# Altium PCB VoltageIndicator_V4.PcbDoc
Units mm, origin at the board's own origin, x right, y up, seen from the top; angles counter-clockwise.
Board outline 100 x 58.17 mm, 2 copper layers (Top Layer, Bottom Layer); 60 components, 37 nets, 146 pads, 21 vias.
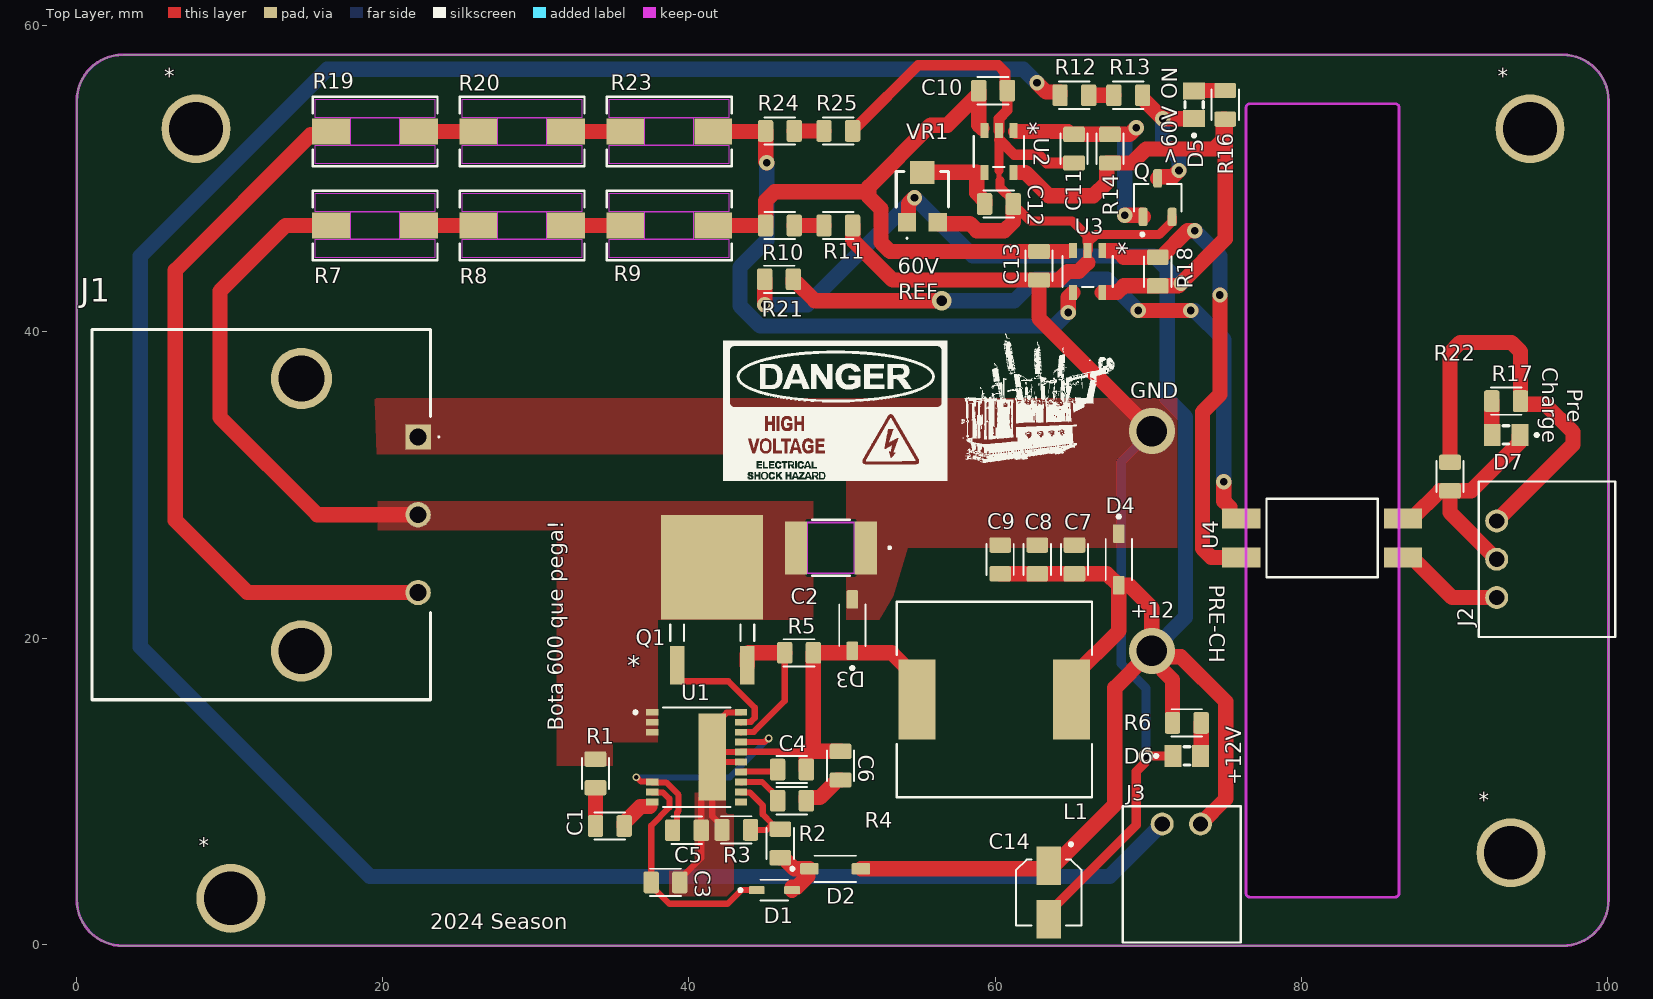
[diagram p0: Top Layer view]
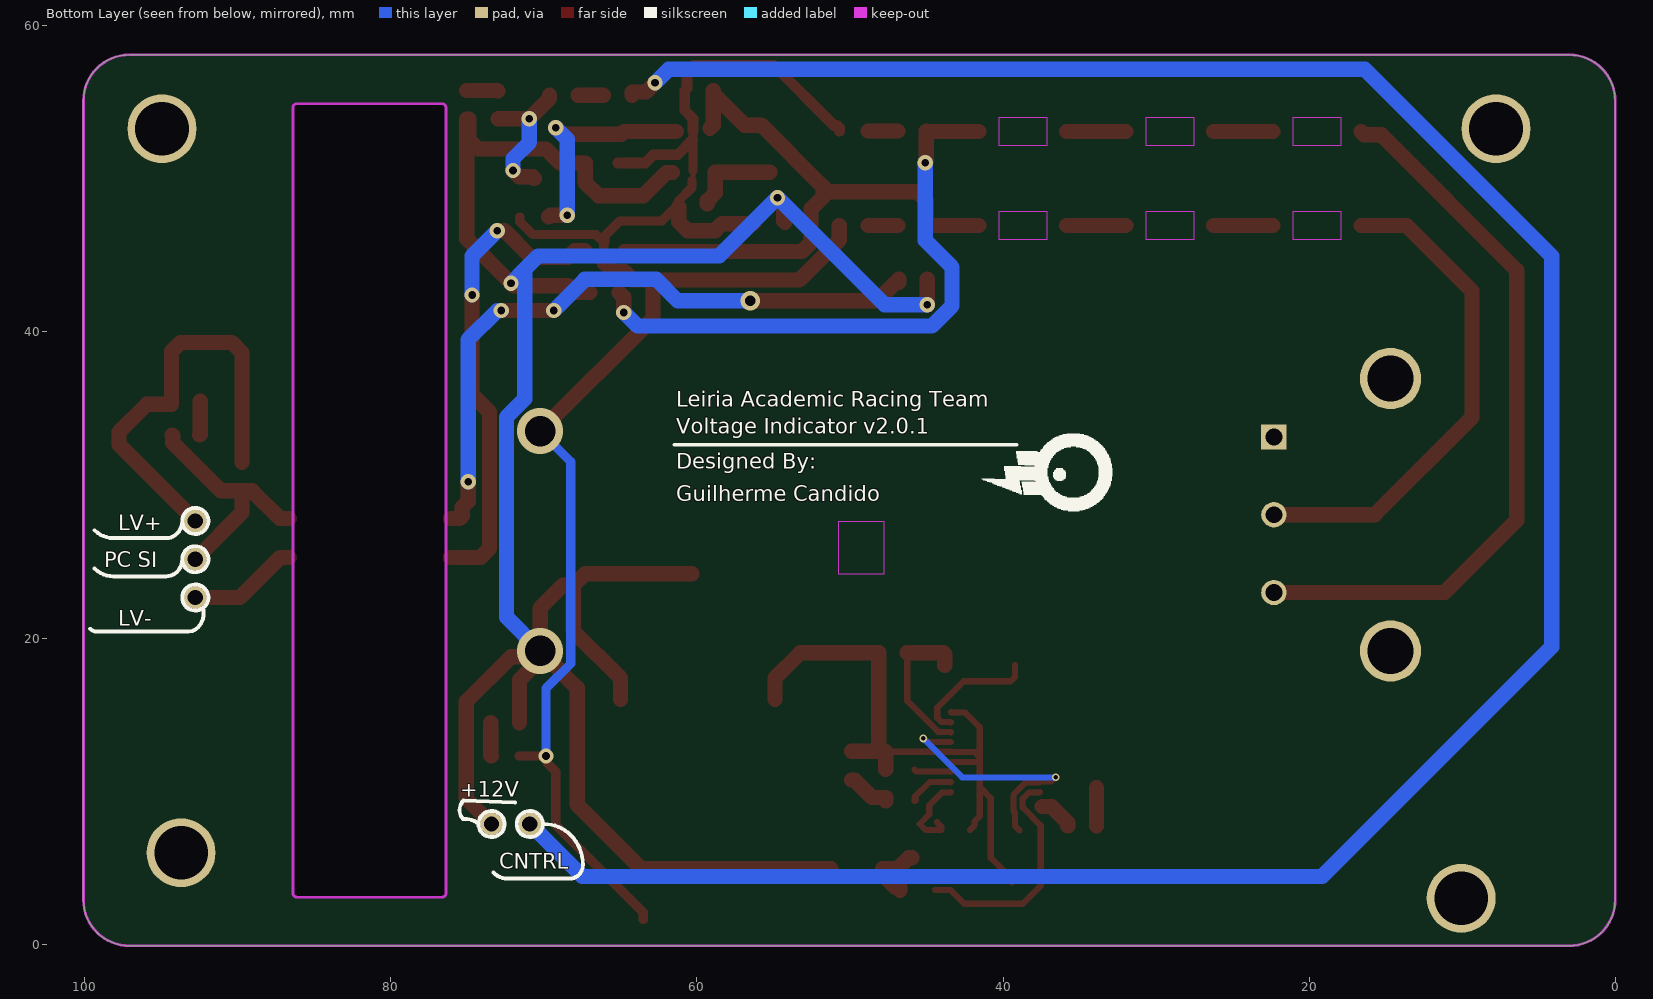
[diagram p1: Bottom Layer view, seen from below]
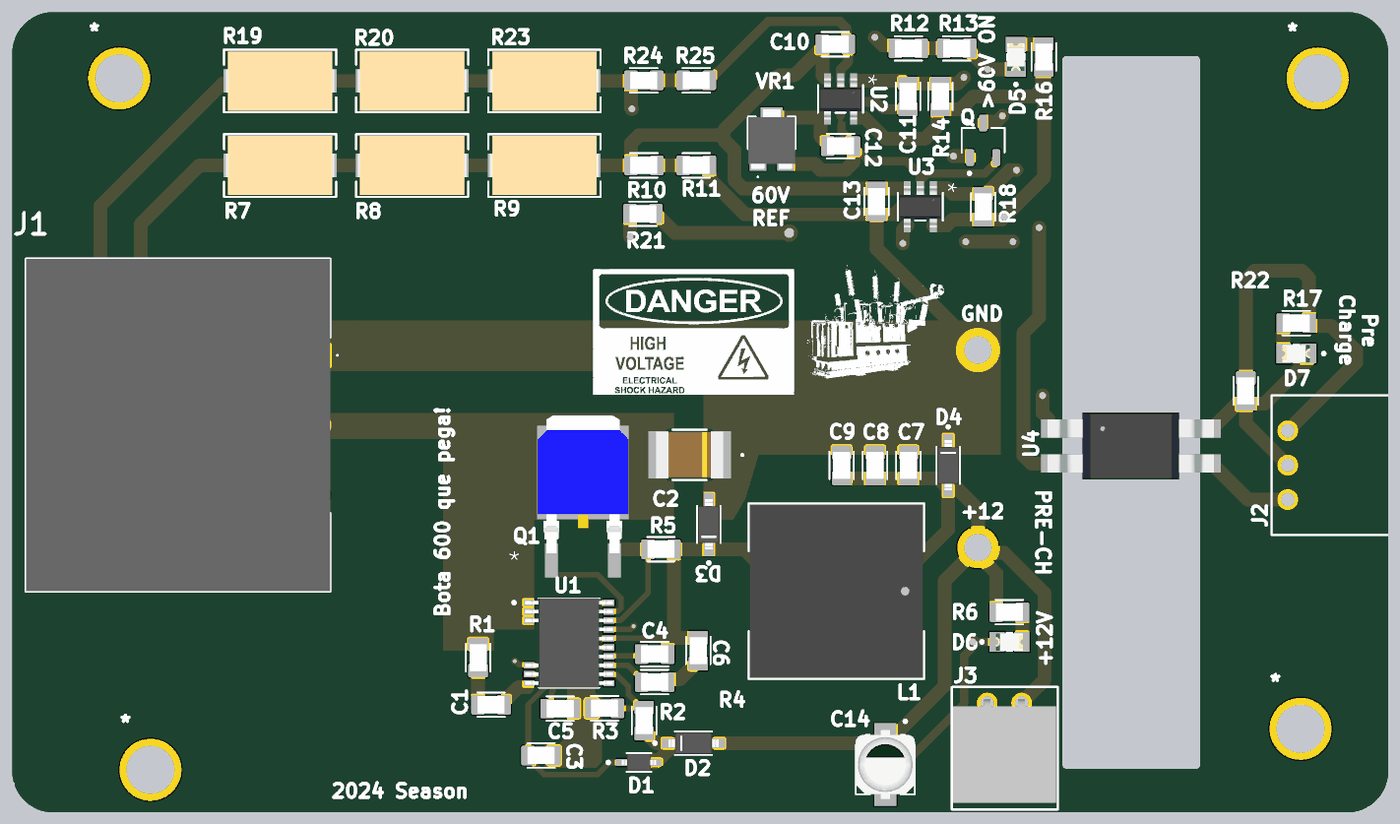
[diagram p2: 3D render of the assembled board from above, using the file's embedded part models]

## Layer stack, top to bottom
Top Solder: solder mask 0.0102, Solder Resist, Dk 3.5
Top Layer: signal copper 0.0356
Dielectric 1: dielectric 0.32, FR-4, Dk 4.8
Bottom Layer: signal copper 0.0356
Bottom Solder: solder mask 0.0102, Solder Resist, Dk 3.5

## Board outline
0.05,2.925 0.05,55.091 cw(c3.05,55.091) 3.05,58.091 97.05,58.091 cw(c97.05,55.091) 100.05,55.091 100.05,2.925 cw(c97.05,2.925) 97.05,-0.075 3.05,-0.075 cw(c3.05,2.925)
cut-out: 76.375,3.354 76.375,54.646 cw(c76.629,54.646) 76.629,54.9 86.121,54.9 cw(c86.121,54.646) 86.375,54.646 86.375,3.354 cw(c86.121,3.354) 86.121,3.1 76.629,3.1 cw(c76.629,3.354)

## Design rules (kind name [scope] priority, off if disabled: settings)
Clearance [All] p1: gap=0.2 ignorepadtopadclearanceinfootprint=TRUE
HoleSize [All] p1: absolutevalues=TRUE maxlimit=6.3 minlimit=0.3 maxpercent=80.000 minpercent=20.000
HoleToHoleClearance [All] p1: gap=0.5 allowstackedmicrovias=TRUE
PolygonConnect DirectConn [InNetClass('DirectPour')] p1: connectstyle=Direct reliefconductorwidth=0.254 reliefentries=4 polygonreliefangle="90 Angle" airgapwidth=0.254
PolygonConnect [All] p2: connectstyle=Relief reliefconductorwidth=0.254 reliefentries=4 polygonreliefangle="90 Angle" airgapwidth=0.254
RoutingVias [All] p1: holewidth=0.711 width=1.27 viastyle="Through Hole" minholewidth=0.3 minwidth=0.5 maxholewidth=6.3 maxwidth=10
SilkToSilkClearance [All] p1: silktosilkclearance=0
SolderMaskExpansion [All] p1: expansion=0.102 istentingtop=FALSE
SupplyNets "Schematic Supply Nets_2" [InNet('+12')] p1: voltage=0.000
SupplyNets "Schematic Supply Nets_1" [InNet('GND')] p2: voltage=0.000
SupplyNets "Schematic Supply Nets" [InNet('LV GND')] p3: voltage=0.000
UnRoutedNet [All] p1: checkbadconnections=TRUE
Width [All] p1: maxlimit=5 minlimit=0.127 preferedwidth=0.5 minimp=50.000000 maximp=50.000000 favimp=50.000000
26 further rules are at their usual default settings.

## Classes and differential pairs
net class DirectPour: GND NetC2_2 NetC3_2
component class "Pre-Charge Detector": C13 D7 R17 R18 R19 R20 R21 R22 R23 R24 R25 U3 U4
component class Connectors: J1 J2 J3
component class Buck: * C1 C2 C3 C4 C5 C6 C7 C8 C9 C14 D1 D2 D3 D4 D6 L1 Q1 R1 R2 R3 R4 R5 R6 U1
component class 60V_Detector: C10 C11 C12 D5 Q R7 R8 R9 R10 R11 R12 R13 R14 R16 U2 VR1

## Components (designator, comment, footprint, x,y, rotation, side; value= is the part's Value field where it differs from the comment)
* "M3 Mounting Hole" "M3 - Mounting Hole"#1 94.615,6 r0 top
* "M3 Mounting Hole" "M3 - Mounting Hole"#2 85.05,50.15 r0 top
* "M3 Mounting Hole" "M3 - Mounting Hole"#3 9.999,3.025 r0 top
* "M3 Mounting Hole" "M3 - Mounting Hole"#4 6.303,53.265 r0 top
C1 "10pF 630VDC" 0805 34.844,7.747 r0 top
C2 "0.1uF 630VDC" 1812 49.276,25.908 r180 top
C3 "10uF 25V" 0805 38.481,4.064 r0 top
C4 "0.1uF" 0805 46.736,11.43 r180 top
C5 "10uF 25V" 0805 39.875,7.469 r0 top
C6 "0.1uF" 0805 49.911,11.684 r270 top
C7 "47uF" 0805 65.179,25.147 r270 top
C8 "47uF" 0805 62.753,25.147 r270 top
C9 "47uF" 0805 60.327,25.147 r270 top
C10 "10uF" 0805 59.863,55.753 r180 top
C11 "10uF" 0805 65.15,51.965 r90 top
C12 "0805_Capacitor" 0805 60.25,48.35 r180 top
C13 "10uF" 0805 62.865,44.323 r90 top
C14 "Electrolytic 4x5.4" "Electrolytic 4x5.4" 63.5,3.401 r270 top
D1 "CMDSH-3TR" SOD-323 45.593,3.556 r0 top
D2 "US1KFA" SOD123 49.559,4.953 r0 top
D3 "US1KFA" SOD123 50.673,20.857 r90 top
D4 "13V" SOD123 68.072,25.146 r270 top
D5 "LED 0805" "LED 0805" 72.989,54.829 r90 top
D6 "LED 0805" "LED 0805" 72.517,12.319 r0 top
D7 "LED 0805" "LED 0805" 93.359,33.275 r180 top
J1 "1-178138-2" 11781382 22.33,33.147 r270 top
J2 "S3B-XH-A(LF)(SN)" "3P JST XH2.54mm 90º" 92.745,27.662 r270 top
J3 "S2B-XH-A-1(LF)(SN)" "2P JST XH2.54mm 90º" 70.906,7.874 r0 top
L1 "7447709102 - WURTH" "7447709102 - WURTH" 59.944,16.002 r180 top
Q "N-MOS" AO3402 70.612,48.768 r90 top
Q1 "N-MOS" "DPAK - MOSFET" 41.529,24.638 r0 top
R1 "10k" 0805 33.909,11.176 r270 top
R2 "21.5k" 0805 45.974,6.604 r270 top
R3 "2.49k" 0805 43.099,7.493 r180 top
R4 "22.1k" 0805 46.736,9.398 r0 top
R5 "220mR" 0805 47.198,19.05 r180 top
R6 "10k" 0805 72.517,14.478 r180 top
R7 "SMV1W390KJT" SMV1W390KJT 19.518,46.945 r180 top
R8 "SMV1W390KJT" SMV1W390KJT 29.119,46.945 r180 top
R9 "SMV1W390KJT" SMV1W390KJT 38.72,46.944 r180 top
R10 "10K" 0805 45.95,46.95 r0 top
R11 "10K" 0805 49.76,46.95 r0 top
R12 "10K" 0805 65.174,55.454 r180 top
R13 "10K" 0805 68.689,55.454 r180 top
R14 "10K" 0805 67.5,51.965 r270 top
R16 "10k" 0805 75.021,54.829 r270 top
R17 "10k" 0805 93.359,35.485 r0 top
R18 "10K" 0805 70.612,43.942 r270 top
R19 "SMV1W390KJT" SMV1W390KJT 19.518,53.083 r180 top
R20 "SMV1W390KJT" SMV1W390KJT 29.119,53.083 r180 top
R21 "10K" 0805 45.893,43.434 r180 top
R22 "0805_Resistor" 0805 89.697,30.562 r90 top
R23 "SMV1W390KJT" SMV1W390KJT 38.72,53.083 r180 top
R24 "10K" 0805 45.95,53.125 r0 top
R25 "10K" 0805 49.76,53.125 r0 top
U1 "My_LT8316" IC_LT8316EFE#PBF 40.515,12.244 r0 top
U2 "MIC6270YM5-TR" MIC6270 60.25,51.775 r270 top
U3 "MIC6270YM5-TR" MIC6270 66.04,43.942 r270 top
U4 "VO617A-3X018T" VO617A 81.35,26.55 r0 top
VR1 "3203X502P" 3203X502P 55.245,48.768 r0 top

## Footprints (in the part's own frame and the unit in brackets; to place one, negate y for a bottom-side part, rotate by r counter-clockwise, add the part's x,y. Pads: shape width x height; smd on the part's side, far side on the other; paste and mask are expansions set on the pad)
"2P JST XH2.54mm 90º" [mil]
  round 59 / inner round 60 / far side round 59 hole 39 paste-99999 mask+0: 1(0,0) 2(98.43,0)
  silkscreen extent -101,-304 202,46, body extent -98,-285 197,10, height 236
"3P JST XH2.54mm 90º" [mil]
  round 59 / inner round 60 / far side round 59 hole 39 paste-99999 mask+0: 1(0,0) 2(98.43,0) 3(196.86,0)
  silkscreen extent -101,-46 298,304, body extent -98,-10 295,285, height 236
0805 [mm]
  rrect25% 1x1.42 smd: 1(-0.935,0) 2(0.935,0)
  silkscreen extent -1,-0.89 1,0.89, body extent -1,-0.63 1,0.63, height 0.6
1812 [mil]
  rect 57x136 smd paste+0 mask+0: 1(-89.5,0) 2(89.5,0)
  Top Layer keep-out region: -59,-65 -59,65 59,65 59,-65
  Keep-Out Layer region: -59,-67 -59,67 59,67 59,-67
  silkscreen extent -154,-72 49,72, body extent -96,-67 96,67, height 86
3203X502P [mm]
  rect 1.2x1.2 smd: 1(-1,-1.6) 3(1,-1.6)
  rect 1.6x1.5 smd: 2(0,1.65)
  silkscreen extent -1.7,-2.7 1.7,1.7, body extent -1.7,-2.08 1.7,2.25, height 2.2
11781382 [mm]
  rect 1.65x1.65 hole 1.1: 1(0,0)
  round 1.65 hole 1.1: 2(5.08,0) 3(10.16,0)
  round 4 hole 3: MH1(-3.81,-7.62) MH2(13.97,-7.62)
  silkscreen extent -7,-21.28 17.16,1.4, body extent -7,-21.28 17.16,0.82, height 11.35
"7447709102 - WURTH" [mil] "1000uH - 900mA"
  rect 95x205 smd paste+0 mask+0: 1(-198.5,0) 2(198.5,0)
  silkscreen extent -251,-251 251,251, body extent -246,-246 246,246, height 394
AO3402 [mm]
  rrect50% 1.21x0.59 smd: 1(-1.255,0.95) 2(-1.255,-0.95) 3(1.255,0)
  silkscreen extent -2.5,-1.56 0.9,1.56
"DPAK - MOSFET" [mil]
  rect 37x98 smd paste+0 mask+0: 1(-90.16,-252) 2(90.16,-252)
  rect 262x268 smd paste+0 mask+0: 3(0,0)
  silkscreen extent -108,-189 108,-147, body extent -130,-231 130,163, height 93
"Electrolytic 4x5.4" [mm]
  rect 2.5x1.6 smd: 1(-1.75,0) 2(1.75,0)
  silkscreen extent -3.25,-2.15 2.15,2.15, body extent -2.5,-2.15 2.5,2.15, height 5.78
IC_LT8316EFE#PBF [mm]
  rect 0.8x0.45 smd: 1(-2.9,2.925) 2(-2.9,2.275) 3(-2.9,1.625) 8(-2.9,-1.625) 9(-2.9,-2.275) 10(-2.9,-2.925) 11(2.9,-2.925) 12(2.9,-2.275) 13(2.9,-1.625) 14(2.9,-0.975) 15(2.9,-0.325) 16(2.9,0.325) 17(2.9,0.975) 18(2.9,1.625) 19(2.9,2.275) 20(2.9,2.925)
  rect 1.78x5.68 smd paste-4: 21(1.016,0)
  silkscreen extent -4.1,-3.25 2.2,3.25, body extent -3.2,-3.25 3.2,3.25, height 1.19
"LED 0805" [mm]
  rect 1.1x1.45 smd: A(0.9,0) C(-0.9,0)
  silkscreen extent -2.1,-0.6 0.2,0.6, body extent -1,-0.63 1,0.63, height 0.7
"M3 - Mounting Hole"#1 [mm]
  round 4.5 / inner round 1.524 / far side round 4.5 hole 3.5: 1(-0.94,0)
"M3 - Mounting Hole"#2 [mm]
  round 4.5 / inner round 1.524 / far side round 4.5 hole 3.5: 1(9.869,3.115)
"M3 - Mounting Hole"#3 [mm]
  round 4.5 / inner round 1.524 / far side round 4.5 hole 3.5: 1(0.101,0)
"M3 - Mounting Hole"#4 [mm]
  round 4.5 / inner round 1.524 / far side round 4.5 hole 3.5: 1(1.524,0)
MIC6270 [mil]
  rect 38.5x20 smd paste+0 mask+0: 1(-53.75,37.4) 2(-53.75,0) 3(-53.75,-37.4) 4(53.75,-37.4) 5(53.75,37.4)
  silkscreen extent -39,-65 40,64, body extent -59,-59 59,59, height 51
SMV1W390KJT [mil]
  rect 97x67 smd paste+0 mask+0: 1(-113,0) 2(113,0)
  Top Layer keep-out region: -62.5,-35.5 -62.5,35.5 62.5,35.5 62.5,-35.5
  Top Layer keep-out region: -153.5,35.5 -153.5,82.5 153.5,82.5 153.5,35.5
  Top Layer keep-out region: -153.5,-82.5 -153.5,-35.5 153.5,-35.5 153.5,-82.5
  Keep-Out Layer region: -62.5,-35.5 -62.5,35.5 62.5,35.5 62.5,-35.5
  silkscreen extent -160,-90 161,89, body extent -156,-84 156,84, height 152
SOD123 [mm]
  rrect18% 1.21x0.73 smd: 1(1.68,0) 2(-1.68,0)
  silkscreen extent -2.9,-0.85 1.35,0.85, body extent -1.83,-0.77 1.83,0.77, height 1.45
SOD-323 [mm]
  rrect25% 1.03x0.52 smd: A(1.15,0) C(-1.15,0)
  silkscreen extent -2.32,-0.68 0.9,0.68, body extent -1.24,-0.62 1.24,0.62, height 1.09
VO617A [mil]
  rect 98.43x52 smd paste+0 mask+0: 1(-208,50) 2(-208,-50) 3(208,-50) 4(208,50)
  silkscreen extent -143,-101 143,101, body extent -238,-96 238,96, height 163

## Part data
C1 C3 C4 C5 C6 C7 C8 C9 C10 C11 C13: library part 0805_Capacitor, Package="0805 AVX", Availability="In Stock", Check_prices=https://www.snapeda.com/parts/LD051A121KAB2A/AVX/view-part/?ref=eda, MF=AVX, MP=LD051A121KAB2A, Price=None, Purchase-URL=https://pricing.snapeda.com/search/part/LD051A121KAB2A/?ref=eda, SnapEDA_Link=https://www.snapeda.com/parts/LD051A121KAB2A/AVX/view-part/?ref=snap
C2: library part 1812_Capacitor, Package="0805 AVX", Availability="In Stock", Check_prices=https://www.snapeda.com/parts/LD051A121KAB2A/AVX/view-part/?ref=eda, MF=AVX, MP=LD051A121KAB2A, Price=None, Purchase-URL=https://pricing.snapeda.com/search/part/LD051A121KAB2A/?ref=eda, SnapEDA_Link=https://www.snapeda.com/parts/LD051A121KAB2A/AVX/view-part/?ref=snap
C12: Package="0805 AVX", Availability="In Stock", Check_prices=https://www.snapeda.com/parts/LD051A121KAB2A/AVX/view-part/?ref=eda, MF=AVX, MP=LD051A121KAB2A, Price=None, Purchase-URL=https://pricing.snapeda.com/search/part/LD051A121KAB2A/?ref=eda, SnapEDA_Link=https://www.snapeda.com/parts/LD051A121KAB2A/AVX/view-part/?ref=snap
C14: Package="RADIAL-2 Panasonic", Availability="In Stock", Check_prices=https://www.snapeda.com/parts/EEE-HA1E100WR/Panasonic/view-part/778519/?ref=eda, MF=Panasonic, MP=EEE-HA1E100WR, Price=None, Purchase-URL=https://pricing.snapeda.com/search/part/EEE-HA1E100WR/?ref=eda, SnapEDA_Link=https://www.snapeda.com/parts/EEE-HA1E100WR/Panasonic/view-part/778519/?ref=snap
D1: "Diode Schottky 30V 100mA Surface Mount SOD-323", Package="SOD-323 Central Semiconductor", Availability=Unavailable, MF="Central Semiconductor", MP="CMDSH-3 TR", Price=None, SnapEDA_Link=https://www.snapeda.com/parts/CMDSH-3%20TR/Central%20Semiconductor%20Corp/view-part/447234/?ref=snap
D2 D3: library part "SOD123 - Rectifier Diode", Package="SOD-123 Fairchild Semiconductor", Availability="In Stock", Check_prices=https://www.snapeda.com/parts/1N4148W-7-F/Diodes+Inc./view-part/?ref=eda, MF="Diodes Inc.", MP=1N4148W-7-F, Price=None, Purchase-URL=https://pricing.snapeda.com/search/part/1N4148W-7-F/?ref=eda, SnapEDA_Link=https://www.snapeda.com/parts/1N4148W-7-F/Diodes+Inc./view-part/?ref=snap
D4: library part "SOD123 - Zener Diode", Package="SMA-2 Taiwan Semiconductor", Availability="In Stock", Check_prices=https://www.snapeda.com/parts/1SMA5926/Taiwan+Semiconductor/view-part/?ref=eda, MF="Taiwan Semiconductor", MP=1SMA5926, Price=None, Purchase-URL=https://pricing.snapeda.com/search/part/1SMA5926/?ref=eda, SnapEDA_Link=https://www.snapeda.com/parts/1SMA5926/Taiwan+Semiconductor/view-part/?ref=snap
D5 D6 D7: "LED Uni-Color Green 4-Pin Chip 0805 T/R", Package=None, Availability=Unavailable, MP=597-3305-607F, Price=None
J1: "Connector", Manufacturer_Name="TE Connectivity", Mouser Part Number=571-1-178138-2, Arrow Part Number=1-178138-2, Arrow Price/Stock=https://www.arrow.com/en/products/1-178138-2/te-connectivity?region=europe, Datasheet Link=https://www.te.com/commerce/DocumentDelivery/DDEController?Action=showdoc&DocId=Customer+Drawing%7F178138%7FE1%7Fpdf%7FEnglish%7FENG_CD_178138_E1.pdf%7F1-178138-2, Height=11.25mm, Manufacturer_Part_Number=1-178138-2, Mouser Price/Stock=https://www.mouser.co.uk/ProductDetail/TE-Connectivity/1-178138-2?qs=CUq%2FfiVWgpCdbQR47qZ9jg%3D%3D
J2: library part "3P JST XH2.54mm 90º", "No Description Available", Mfr_Name=JST, Copyright="Copyright (C) 2024 Ultra Librarian. All rights reserved.", Manufacturer_Part_Number=S3B-XH-A(LF)(SN), RefDes=RefDes, Type=DEV
J3: library part "2P JST XH2.54mm 90º", "No Description Available", Mfr_Name=JST, Copyright="Copyright (C) 2024 Ultra Librarian. All rights reserved.", Manufacturer_Part_Number=S2B-XH-A-1(LF)(SN), RefDes=RefDes, Type=DEV
L1: "1000uH - 900mA", Package="Nonstandard Bourns", Digi-Key_Part_Number=SRR1260-680MCT-ND, Digi-Key_Purchase_URL=https://www.digikey.com/product-detail/en/bourns-inc/SRR1260-680M/SRR1260-680MCT-ND/2127423?utm_source=snapeda&utm_medium=aggregator&utm_campaign=symbol, MF=Bourns, MP=SRR1260-680M, SnapEDA_Link=https://www.snapeda.com/parts/SRR1260-680M/Bourns/view-part/337191/?ref=snap
Q Q1: "D-PAK", Package="SOT-23 Alpha &amp; Omega Semiconductor", Digi-Key_Part_Number=785-1002-1-ND, Digi-Key_Purchase_URL=https://www.digikey.ca/product-detail/en/alpha-omega-semiconductor-inc/AO3402/785-1002-1-ND/1855944?utm_source=snapeda&utm_medium=aggregator&utm_campaign=symbol, MF="Alpha &", MP=AO3402, SnapEDA_Link=https://www.snapeda.com/parts/AO3402/Alpha%20&%20Omega%20Semiconductor%20Inc./view-part/564857/?ref=snap
R1 R2 R3 R4 R5 R6 R10 R11 R12 R13 R14 R16 R17 R18 R21 R24 R25: library part 0805_Resistor, Package=0805, Power_Rating=".25 W", Resistance=.33, Tolerance=1%, Availability="In Stock", Check_prices=https://www.snapeda.com/parts/2-2176053-0/TE+Connectivity/view-part/?ref=eda, EU_RoHS_Compliance="Compliant with Exemptions", MF="TE Connectivity", MP=2-2176053-0, Price=None, SnapEDA_Link=https://www.snapeda.com/parts/2-2176053-0/TE+Connectivity/view-part/?ref=snap
R7 R8 R9 R19 R20 R22 R23: Package=0805, Power_Rating=".25 W", Resistance=.33, Tolerance=1%, Availability="In Stock", Check_prices=https://www.snapeda.com/parts/2-2176053-0/TE+Connectivity/view-part/?ref=eda, EU_RoHS_Compliance="Compliant with Exemptions", MF="TE Connectivity", MP=2-2176053-0, Price=None, SnapEDA_Link=https://www.snapeda.com/parts/2-2176053-0/TE+Connectivity/view-part/?ref=snap
U2 U3: "No Description Available", Mfr_Name=Microchip, Copyright="Copyright (C) 2024 Ultra Librarian. All rights reserved.", Manufacturer_Part_Number=MIC6270YM5-TR, RefDes=RefDes, Type=DEV
U4: library part VO617A, "VO617A-3X018T Optocoupler Dc-in 1-CH Transistor Dc-out 4-PIN PDIP SMD T/r", NexarPartId=68099910, Number of Channels=1
VR1: "Variable Resistor", Manufacturer_Name="TE Connectivity", Mouser Part Number=279-3203X502P, Arrow Part Number=3203X502P, Arrow Price/Stock=https://www.arrow.com/en/products/3203x502p/te-connectivity?region=nac, Datasheet Link=https://www.te.com/commerce/DocumentDelivery/DDEController?Action=showdoc&DocId=Customer+Drawing%7F1623916%7FBA1%7Fpdf%7FEnglish%7FENG_CD_1623916_BA1.pdf%7F1-1623916-0, Height=2.1mm, Manufacturer_Part_Number=3203X502P, Mouser Price/Stock=https://www.mouser.co.uk/ProductDetail/TE-Connectivity-Holsworthy/3203X502P?qs=GP7tGcbp1QQJNQgoJp42%2Fg%3D%3D

## Via types
v1: diameter 1, hole 0.5, Top Layer to Bottom Layer, tented both sides, 16 vias
v2: diameter 3, hole 2, Top Layer to Bottom Layer, 2 vias
v3: diameter 0.5, hole 0.3, Top Layer to Bottom Layer, tented both sides, 2 vias
v4: diameter 1.27, hole 0.711, Top Layer to Bottom Layer, tented both sides, 1 vias

## Nets (pads, with @x,y where several pads share a name; then routed paths per layer and width w, separated by ;. In a path a pad name is that pad's centre, name@x,y a point inside that pad or via, vN(x,y) a via of type N, cw(c..) or ccw(c..) an arc to the next point about the centre after c; other vN are vias at no path point)
+12: C7.2 C8.2 C9.2 C14.1 D2.1 D4.1 J3.2 L1.1 R6.2 R14.2 R16.2 R18.2 R21.2 U2.5 U3.5 VR1.1 | length 168.4
  Top Layer w1: v1(44.958,41.783) R21.2 ; D2.1 59.055,4.953 59.817,4.953 61.976,4.953 63.627,4.953 67.818,9.144 67.818,16.764 69.96,18.906 v2(70.231,19.177) ; VR1.1 54.345,47.268 54.345,48.376 v1(54.737,48.768) ; C9.2 C8.2 C7.2 67.296,24.212 68.042,23.466 D4.1 ; 61.595,50.41 61.985,50.41 63.5,48.895 66.421,48.895 67.29,49.764 67.29,51.03 R14.2 68.937,51.03 69.85,51.943 74.295,51.943 74.881,52.529 74.881,53.894 R16.2 75.021,46.065 v1(72.136,43.18) 71.963,43.007 R18.2 68.402,43.007 67.972,42.577 U3.5 ; L1.1 64.986,17.399 68.072,20.485 D4.1 ; v2@70.231,18.636 71.582,17.285 R6.2 ; J3.2 75.057,9.525 75.057,15.875 72.138,18.794 70.614,18.794 v2(70.231,19.177) ; D4.1 68.736,23.466 70.231,21.971 v2(70.231,19.177)
  Bottom Layer w1: v1(44.958,41.783) 47.752,41.783 v1(54.737,48.768) 58.547,44.958 70.358,44.958 71.247,44.069 ; v2(70.231,19.177) 72.431,21.377 72.431,34.439 71.247,35.623 71.247,44.069 ; v1(72.136,43.18) 71.247,44.069
GND: C2.1 C7.1 C8.1 C9.1 C10.1 C11.1 C12.1 C13.1 C14.2 D3.1 D4.2 D6.C J1.1 Q.2 R11.2 R25.2 U2.2 U3.2 VR1.3 | length 115.5
  Top Layer w0.3: 60.25,50.122 60.25,50.546 ; C12.1@61.185,48.265 C12.1
  Top Layer w0.6: 60.25,50.546 U2.2 ; 60.315,49.881 60.315,49.43 61.185,48.56 C12.1 C12.1@61.185,48.14 ; C12.1@61.185,48.265 C12.1@61.185,48.14 ; C14.2 63.5,2.101 69.215,7.816 69.215,11.303 69.773,11.861 69.773,12.242 v1(69.85,12.319) D6.C ; 65.994,45.853 65.994,46.274 65.024,47.244 62.291,47.244 61.595,47.94 61.385,47.94 C12.1@61.185,48.14 ; 66.04,44.524 U3.2 66.086,45.353 66.086,45.853 66.592,46.359 70.708,46.359 71.562,47.213 Q.2
  Top Layer w0.7: R25.2 50.695,53.335 50.845,53.485 51.055,53.485 54.974,57.404 60.198,57.404 60.648,56.954 60.648,55.903 C10.1 60.798,54.471 60.25,53.923 U2.2 ; 60.291,52.528 61.257,51.562 62.833,51.562 63.365,51.03 C11.1
  Top Layer w1: R11.2 50.695,46.001 53.308,43.388 C13.1 ; VR1.3 56.345,47.068 58.345,47.068 58.804,46.609 60.599,46.609 61.185,47.195 C12.1@61.185,48.14 ; 66.04,44.524 65.458,43.942 64.722,43.942 64.168,43.388 C13.1 ; v2(70.231,33.528) 62.865,40.894 C13.1
  Bottom Layer w0.6: v1(69.85,12.319) 69.85,16.73 68.231,18.349 68.231,31.528 v2(70.231,33.528)
INTVCC: C5.1 U1.8 U1.17 | length 17.3
  Top Layer w0.4: v3(36.576,10.922) 36.603,10.922 36.881,10.644 37.59,10.644 U1.8 37.64,10.594 38.515,10.594 39.335,9.774 39.335,8.717 39.24,8.623 39.24,7.769 C5.1 ; U1.17 44.942,13.219 45.185,13.462 v3(45.212,13.462)
  Bottom Layer w0.4: v3(36.576,10.922) 42.672,10.922 v3(45.212,13.462)
"LV GND": J2.3 U4.3 | length 7.2
  Top Layer w1: U4.3 87.223,25.28 89.841,22.662 J2.3
NetC1_1: C1.1 R1.2 | length 2.5
  Top Layer w1: C1.1 33.909,7.957 R1.2
NetC1_2: C1.2 U1.10 | length 2.3
  Top Layer w1: C1.2 35.779,7.957 36.839,9.017 37.465,9.017
NetC2_2: C2.2 J1.2 Q1.3 R1.1 R7.2 U1.1 U1.2 U1.3 | length 33.1
  Top Layer w1: R7.2 13.671,46.945 9.398,42.672 9.398,34.417 15.748,28.067 J1.2@22.622,28.067
NetC3_1: C3.1 D1.C U1.9 | length 15.2
  Top Layer w0.4: U1.9 37.64,9.944 38.316,9.944 38.735,9.525 38.735,8.966 37.546,7.777 C3.1 37.546,3.854 38.733,2.667 42.537,2.667 43.426,3.556 D1.C
NetC3_2: C3.2 C4.1 C5.2 C6.1 D3.2 L1.2 R3.2 R5.1 U1.15 U1.16 U1.20 U1.21 | length 43.2
  Top Layer w0.4: C3.2 39.416,4.274 40.81,5.668 C5.2 40.81,9.573 U1.21@41.531,10.294 ; R3.2 41.864,7.793 41.864,8.047 41.531,8.38 U1.21@41.531,10.294 ; U1.15 41.55,11.919 U1.21@41.531,11.938 ; U1.20 43.39,15.144 42.481,15.144 41.531,14.194 U1.21 ; 48.343,12.594 47.671,12.594 43.44,12.594 U1.16 41.856,12.569 U1.21 ; U1.21@41.531,10.294 U1.21@41.531,11.938 ; U1.21@41.531,11.938 U1.21
  Top Layer w1: C4.1 47.671,12.594 ; 48.133,12.611 R5.1 50.673,19.05 53.251,19.05 54.902,17.399 L1.2 ; 48.343,12.619 C6.1
NetC4_2: C4.2 U1.14 | length 2.5
  Top Layer w0.4: U1.14 43.44,11.294 45.665,11.294 C4.2
NetC6_2: C6.2 R4.2 | length 2.9
  Top Layer w1: R4.2 47.671,9.608 48.56,9.608 49.701,10.749 C6.2
NetC10_2: C10.2 C13.2 R9.1 R10.1 U2.3 U3.3 | length 40.6
  Top Layer w1: R9.1 45.015,46.944 45.015,48.563 45.601,49.149 51.759,49.149 ; C10.2 C10.2@58.928,55.543 ; U2.3@59.141,53.299 58.928,53.512 C10.2@58.928,55.543 ; 64.724,45.258 C13.2 53.135,45.258 52.549,45.844 52.549,48.035 51.759,48.825 51.759,49.472 55.788,53.5 56.885,53.5 C10.2@58.928,55.543
NetC11_2: C11.2 Q.1 R14.1 U2.1 | length 15.4
  Top Layer w1: U2.1@61.341,53.086 64.754,53.086 64.94,52.9 C11.2 R14.1 68.775,52.9 v1(69.215,53.34) ; v1(68.453,47.625) 68.46,47.618 69.557,47.618 Q.1
  Bottom Layer w1: v1(68.453,47.625) 68.453,52.578 v1(69.215,53.34)
NetC12_2: C12.2 U2.4 VR1.2 | length 5.8
  Top Layer w1: VR1.2 VR1.2 58.801,50.419 58.801,49.074 59.315,48.56 C12.2
NetD1_A: D1.A D2.2 R2.2 | length 4.2
  Top Layer w1: R2.2 46.184,5.669 46.9,4.953 D2.2 47.774,4.848 47.774,4.474 47.053,3.753 46.758,3.753 46.743,3.738 D1.A
NetD5_A: D5.A R16.1 | length 2
  Top Layer w1: D5.A 73.024,55.764 R16.1
NetD5_C: D5.C Q.3 R13.1 | length 9.6
  Top Layer w1: R13.1 69.624,55.244 v1(70.938,53.929) D5.C ; Q.3 70.717,50.128 71.591,50.128 v1(72.009,50.546)
  Bottom Layer w1: v1(70.938,53.929) 70.938,52.379 72.009,51.308 v1(72.009,50.546)
NetD6_A: D6.A R6.1 | length 2.2
  Top Layer w1: D6.A 73.452,12.354 R6.1
NetD7_A: D7.A R17.1 | length 2.2
  Top Layer w1: R17.1 92.424,33.31 D7.A
NetD7_C: D7.C J2.2 R22.1 U4.4 | length 15.9
  Top Layer w1: U4.4 87.223,27.82 89.03,29.627 R22.1 ; J2.2 89.697,28.21 R22.1 ; D7.C 94.209,33.225 94.209,32.76 91.076,29.627 R22.1
NetJ1_3: J1.3 R19.2 | length 48.1
  Top Layer w1: R19.2 16.446,52.881 15.329,52.881 6.477,44.029 6.477,27.686 11.176,22.987 J1.3
NetJ2_1: J2.1 R17.2 R22.2 | length 27.8
  Top Layer w1: R22.2 89.697,38.643 90.364,39.31 93.708,39.31 94.294,38.724 94.294,35.275 95.916,35.275 97.723,33.468 97.723,32.64 J2.1
NetJ3_1: J3.1 R12.2 | length 165.8
  Top Layer w1: v1(62.738,56.261) 63.335,55.664 64.239,55.664 R12.2
  Bottom Layer w1: v1(62.738,56.261) 61.849,57.15 16.383,57.15 4.191,44.958 4.191,19.431 19.177,4.445 67.477,4.445 J3.1
NetQ1_1: Q1.1 U1.19 | length 8.3
  Top Layer w0.4: Q1.1 39.239,17.462 39.509,17.193 42.582,17.193 44.305,15.47 44.305,14.8 44.048,14.544 43.44,14.544 U1.19
NetQ1_2: Q1.2 R5.2 U1.18 | length 10
  Top Layer w0.4: U1.18 43.44,13.894 44.247,13.894 46.263,15.91 R5.2
  Top Layer w1: Q1.2 43.819,18.952 43.917,19.05 R5.2
NetR2_1: R2.1 R3.1 U1.12 | length 5.5
  Top Layer w0.4: U1.12 43.44,9.944 43.981,9.944 44.831,9.094 44.831,8.509 45.464,7.876 45.081,7.493 R3.1 44.034,7.703 R3.1@44.334,8.003
NetR4_1: R4.1 U1.13 | length 3.1
  Top Layer w0.4: U1.13@43.44,10.594 U1.13 44.79,10.619 45.801,9.608 R4.1 ; R4.1@45.702,9.451 R4.1@45.755,9.398
NetR7_1: R7.1 R8.2 | length 3.9
  Top Layer w1: R7.1 R8.2
NetR8_1: R8.1 R9.2 | length 3.9
  Top Layer w1: R8.1 R9.2
NetR10_2: R10.2 R11.1 | length 1.9
  Top Layer w1: R10.2 R11.1
NetR12_1: R12.1 R13.2 | length 1.6
  Top Layer w1: R12.1 R13.2
NetR18_1: R18.1 U3.1 U4.2 | length 31.3
  Top Layer w1: 67.31,45.307 67.972,45.307 68.402,44.877 R18.1 70.822,44.877 72.554,46.609 v1(73.025,46.609) ; v1(74.676,42.418) 74.676,35.912 73.533,34.769 73.533,25.866 74.119,25.28 U4.2
  Bottom Layer w1: v1(73.025,46.609) 74.676,44.958 v1(74.676,42.418)
NetR19_1: R19.1 R20.2 | length 3.9
  Top Layer w1: R19.1 R20.2
NetR20_1: R20.1 R23.2 | length 3.9
  Top Layer w1: R20.1 R23.2
NetR21_1: R21.1 U4.1 | length 43.4
  Top Layer w1: R21.1 46.828,43.224 47.038,43.224 48.225,42.037 v4@56.442,42.037 ; v1(69.342,41.402) v1(72.771,41.402) ; v1(74.93,30.226) 74.93,28.957 75.317,28.57 75.317,27.98 75.477,27.82 U4.1
  Bottom Layer w1: v4(56.515,42.037) 61.251,42.037 62.648,43.434 67.31,43.434 v1(69.342,41.402) ; v1(72.771,41.402) 73.025,41.402 74.93,39.497 v1(74.93,30.226)
NetR23_1: R23.1 R24.1 U3.4 | length 39.4
  Top Layer w1: R23.1 R24.1@45.015,53.083 ; R24.1 R24.1@45.015,53.083 ; v1(45.085,51.054) 45.015,51.124 R24.1@45.015,53.083 ; v1(64.77,41.275) 64.77,42.257 U3.4
  Bottom Layer w1: v1(45.085,51.054) 45.085,45.974 43.34,44.229 43.34,41.704 44.658,40.386 63.881,40.386 v1(64.77,41.275)
NetR24_2: R24.2 R25.1 | length 1.9
  Top Layer w1: R24.2 R25.1
pads on no net: *.1 J1.MH1 J1.MH2 U1.11
copper on no net: | length 0.5
  Top Layer w0.5: 75.808,25.272 76.062,25.272 ; 75.808,25.28 76.067,25.28

## Polygon pours and split planes (outlines as drawn)
NetC2_2 on Top Layer "NETC2_2_L01_P001" (solid, remove dead copper, pour order 1): 35.052,11.684 35.052,13.208 37.973,13.208 37.973,21.209 48.133,21.209 48.133,28.956 19.685,28.956 19.685,27.051 31.369,27.051 31.369,11.684
GND on Top Layer "GND_L01_P000" (solid, remove dead copper, pour order 0): 19.493,35.687 71.882,35.687 71.882,25.908 54.292,25.908 53.34,22.733 52.451,21.209 50.292,21.209 50.292,32.004 19.623,32.004
NetC3_2 on Top Layer "NETC3_2_L01_P002" (solid, remove dead copper, pour order 2): 38.735,4.826 38.735,3.175 42.672,3.175 42.926,3.429 42.926,8.509 42.545,8.509 42.418,8.636 42.418,9.906 40.386,9.906 40.386,5

## Keep-outs
Keep-Out Layer:
  lines w0.18: 0.05,2.925 ccw(c3.05,2.925) 3.05,-0.075 97.05,-0.075 ccw(c97.05,2.925) 100.05,2.925 100.05,55.091 ccw(c97.05,55.091) 97.05,58.091 3.05,58.091 ccw(c3.05,55.091) 0.05,55.091 0.05,2.925 ; 76.375,3.354 ccw(c76.629,3.354) 76.629,3.1 86.121,3.1 ccw(c86.121,3.354) 86.375,3.354 86.375,54.646 ccw(c86.121,54.646) 86.121,54.9 76.629,54.9 ccw(c76.629,54.646) 76.375,54.646 76.375,3.354

## Silkscreen, mask and mechanical layers (free items; w line width, h text height)
Top Overlay:
  drawing of 344 lines, arcs and shapes, not listed
  text ">60V ON" at 71.882,50.927 h1 r90
  text "60V" at 53.658,43.79 h1
  text "REF" at 53.688,42.125 h1
  text "Charge" at 95.716,37.695 h1 r270
  text "Pre" at 97.367,36.298 h1 r270
  text "GND" at 68.834,35.687 h1
  text "PRE-CH" at 73.975,23.5 h1 r270
  text "+12" at 68.834,21.336 h1
  text "Bota 600 que pega!" at 31.798,13.97 h1 r90
  text "+12V" at 76.073,10.414 h1 r90
  text "2024 Season" at 23.114,1.016 h1
Bottom Overlay:
  drawing of 33 lines, arcs and shapes, not listed
  text "Leiria Academic Racing Team" at 61.341,35.131 h1
  text "Voltage Indicator v2.0.1" at 61.341,33.353 h1
  text "Designed By:" at 61.341,31.067 h1
  text "Guilherme Candido" at 61.341,28.956 h1
  text "LV+" at 97.79,27.051 h1
  text "PC SI" at 98.679,24.638 h1
  text "LV-" at 97.79,20.828 h1
  text "+12V" at 75.438,9.652 h1
  text "CNTRL" at 72.898,4.953 h1

## Text inside footprints (layer, text, board x,y; h text height)
Q1: Top Overlay "*" at 35.996,17.602 h1.27; Mechanical 13 "*" at 38.921,21.209 h1.27
U2: Top Overlay "*" at 61.581,53.712 h1.27 r270; Mechanical 13 "*" at 60.489,52.715 h1.27 r270
U3: Top Overlay "*" at 67.371,45.879 h1.27 r270; Mechanical 13 "*" at 66.279,44.882 h1.27 r270
U4: Top Overlay "*" at 75.495,29.014 h0; Mechanical 13 "*" at 77.908,27.642 h0